# Altium PCB PowerSupply.PcbDoc (part 2 of 2)
Units mil, origin at the board's own origin, x right, y up, seen from the top; angles counter-clockwise.
Board outline 2820 x 1020 mil, 2 copper layers (Top Layer, Bottom Layer); 30 components, 23 nets, 113 pads, 44 vias.
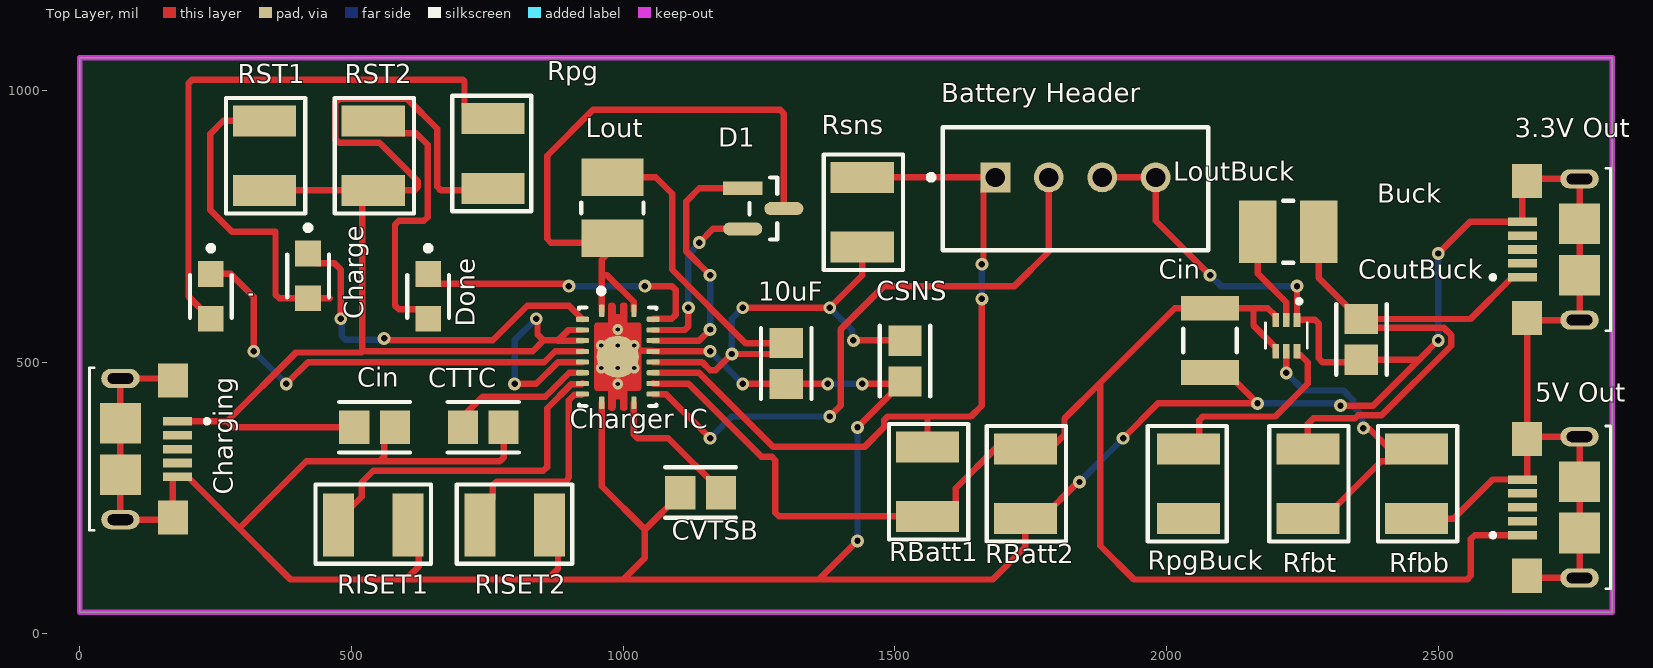
[diagram p0: Top Layer view]

## Via types
v1: diameter 23.62, hole 11.81, Top Layer to Bottom Layer, 36 vias
v2: diameter 19.68, hole 7.87, Top Layer to Bottom Layer, 8 vias

## Nets (pads, with @x,y where several pads share a name; then routed paths per layer and width w, separated by ;. In a path a pad name is that pad's centre, name@x,y a point inside that pad or via, vN(x,y) a via of type N, cw(c..) or ccw(c..) an arc to the next point about the centre after c; other vN are vias at no path point) (continued)
ISET1: "Charger IC.8" RISET1.2 | length 603.6
  Top Layer w11.81: RISET1.2@496.02,229.53 518.66,252.17 518.66,278.66 540,300 853.08,300 860,306.92 860,414.95 904.66,459.61 923.86,459.61 925.04,460.79
ISET2: "Charger IC.9" RISET2.2 | length 354.8
  Top Layer w11.81: RISET2.2@752.05,240 760,247.95 760,273.08 766.92,280 893.08,280 900,286.92 900,429.89 910.03,439.92 923.86,439.92 925.04,441.1
NetBuck_2: Buck.2 LoutBuck.1 | length 183.9
  Top Layer w11.81: LoutBuck.1 2167.76,663.03 2220.31,610.47 Buck.2
NetCharge_2: Charge.2 RST1.2 | length 604.9
  Top Layer w11.81: RST1.2 263.98,943.98 240,920 240,780 280,740 360,740 360,624.24 366.92,617.32 459.74,617.32
NetDone_2: Done.2 RST2.2 | length 537.2
  Top Layer w11.81: RST2.2 562.64,921.34 618.66,921.34 640,900 640,766.92 633.08,760 586.92,760 580,753.08 580,604.28 586.92,597.36 623.43,597.36 Done.2
OUT: "Charger IC.1" "Charger IC.20" D1.3 Lout.1 | length 1144.2
  Top Layer w11.81: 960.47,594.65 960.47,660 ; Lout.1@980,707.76 960.47,688.23 960.47,660 ; Lout.1 972.24,720 866.92,720 860,726.92 860,880 944.39,964.39 1288.69,964.39 1295.61,957.48 D1.3 ; 1019.53,594.65 1019.33,594.84 1019.33,610.88 970.21,660 960.47,660
PG: "Charger IC.5" '.1 | length 851.1
  Top Layer w11.81: '.1 277.68,662.32 320,620 v1(320,520) ; v1(380,460) 420,500 854.95,500 874.79,519.84 925.04,519.84
  Bottom Layer w11.81: v1(320,520) v1(380,460)
PGBuck: Buck.6 RpgBuck.1 | length 387
  Top Layer w11.81: RpgBuck.1@2020,340 RpgBuck.1@2049.53,340 ; RpgBuck.1@2040,343.98 2060,363.98 2060,393.08 2066.92,400 2200,400 2260,460 2260,500 2247.09,512.91 2240.2,512.91 2240,513.11 Buck.6
PGND1: "Charger IC.17" D1.1 | length 481.4
  Top Layer w11.81: 1054.96,539.53 1139.53,539.53 v1(1160,560) ; v1(1160,660) 1116.38,703.62 1116.38,796.38 1140,820 D1.1
  Bottom Layer w11.81: v1(1160,560) v1(1160,660)
PGND2: "Charger IC.18" D1.2 | length 300.5
  Top Layer w11.81: 1054.96,559.21 1113.08,559.21 1120,566.13 v1(1120,600) ; v1(1140,720) 1165.2,745.2 D1.2@1200,745.2
  Bottom Layer w11.81: v1(1120,600) 1120,698.24 1140,718.24 v1(1140,720)
Rpg: '.2 Rpg.1 | length 1070.1
  Top Layer w11.81: '.2 200,620.79 200,1013.08 206.92,1020 704.33,1020 707.83,1016.5 707.83,970.59 730.47,947.95 Rpg.1
STAT1: "Charger IC.2" Charge.1 | length 678.1
  Top Layer w11.81: Charge.1 437.72,682.28 468.12,682.28 480,670.4 v1(480,580) ; v1(560,543.62) 562.26,541.36 570.61,541.36 571.97,540 760,540 823.62,603.62 900.31,603.62 925.04,578.9
  Bottom Layer w11.81: v1@481.86,578.66 481.86,548.26 488.78,541.34 v1@549.36,541.34 ; v1@549.39,541.36 557.74,541.36 v1(560,543.62)
STAT2: "Charger IC.19" Done.1 | length 558.3
  Top Layer w11.81: Done.1 658.86,644.61 892.2,644.61 896.8,640 v1(900,640) ; v1(1040,640) 1089.46,640 1096.38,633.08 1096.38,586.92 1089.46,580 1056.06,580 1054.96,578.9
  Bottom Layer w11.81: v1(900,640) v1(1040,640)
TS: "Battery Header.2" "Charger IC.12" | length 1122.8
  Top Layer w11.81: 1054.96,441.1 1078.9,441.1 v1(1160,360) ; v1(1380,400) 1400,420 1400,560 1480,640 1720,640 1783.15,703.15 1783.15,840
  Bottom Layer w11.81: v1(1160,360) 1200,400 v1(1380,400)
TTC: "Charger IC.7" CTTC.2 | length 256.3
  Top Layer w11.81: CTTC.2@705.02,397.21 705.02,400.25 741.16,436.38 856.38,436.38 900.47,480.47 925.04,480.47
VBATT: "Battery Header.1" "Charger IC.14" RBatt1.2 Rsns.2 | length 1433.2
  Top Layer w11.81: 1054.96,480.47 1139.53,480.47 1276.02,343.98 1443.98,343.98 1480,380 1480,393.08 1486.92,400 1563.46,400 ; Rsns.2 1684.72,840 1663.07,818.35 1663.07,686.27 1660,683.2 v1(1660,680) ; RBatt1.2 1560,396.54 1563.46,400 ; v1(1660,616.38) 1660,420 1640,400 1563.46,400
  Bottom Layer w11.81: v1(1660,616.38) v1(1660,680)
VTSB: "Charger IC.11" CVTSB.2 | length 265
  Top Layer w11.81: 1019.53,425.35 1019.53,366.92 1026.45,360 1083.04,360 1180,263.04 CVTSB.2
pads on no net: "3.3V Out.2" "3.3V Out.3" "3.3V Out.4" "5V Out.2" "5V Out.3" "5V Out.4" "RpgBuck. " Charging.2 Charging.3 Charging.4

## Keep-outs
Keep-Out Layer:
  lines w10: 0,40 0,1060 2820,1060 2820,1020 2820,40 0,40

## Text inside footprints (layer, text, board x,y; h text height)
"3.3V Out": Mechanical 13 "PCB END" at 2807.24,898.19 h16 r90
"5V Out": Mechanical 13 "PCB END" at 2807.24,423.7 h16 r90
Charging: Mechanical 13 "PCB END" at 27.44,149.06 h16 r270